# Altium PCB PCB1.PcbDoc
Units mm, origin at the board's own origin, x right, y up, seen from the top; angles counter-clockwise.
Board outline 40.25 x 29.9 mm, 2 copper layers (Top Layer, Bottom Layer); 27 components, 40 nets, 134 pads, 32 vias.
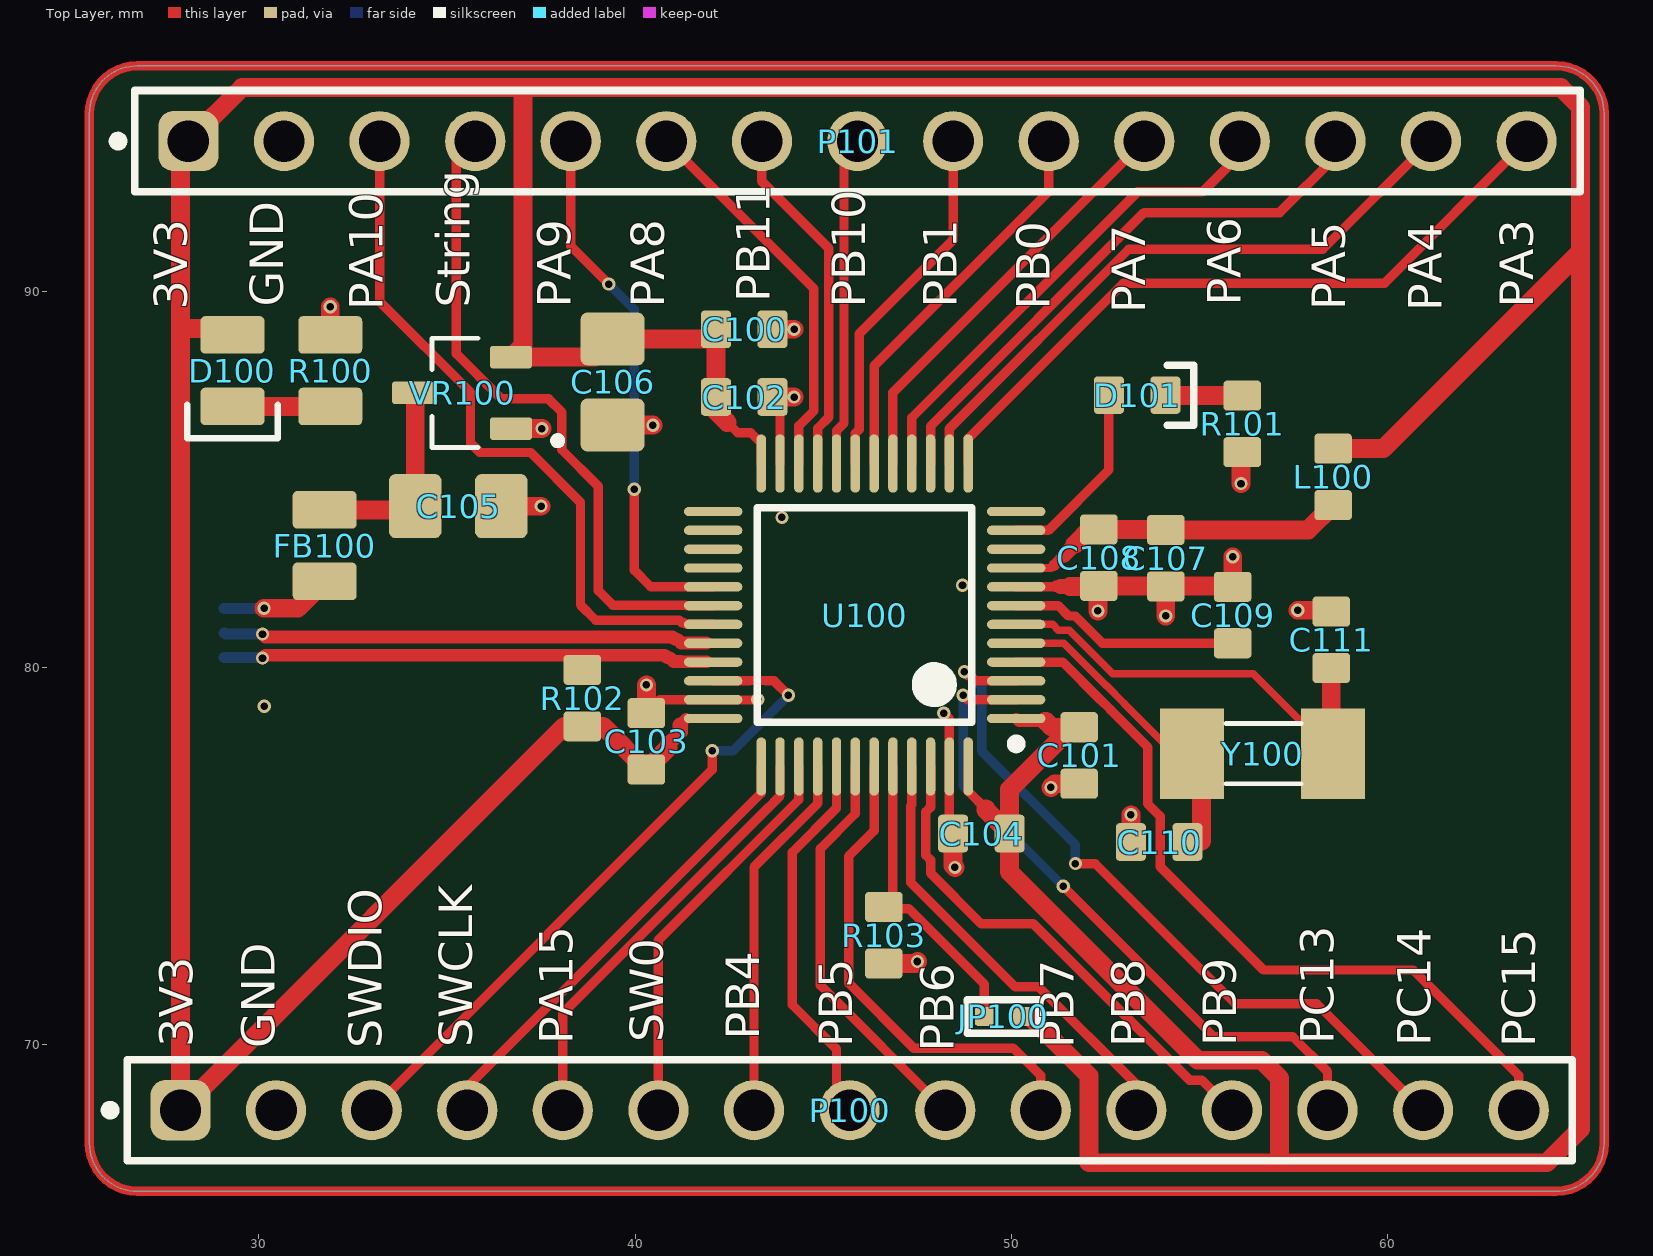
[diagram p0: Top Layer view]
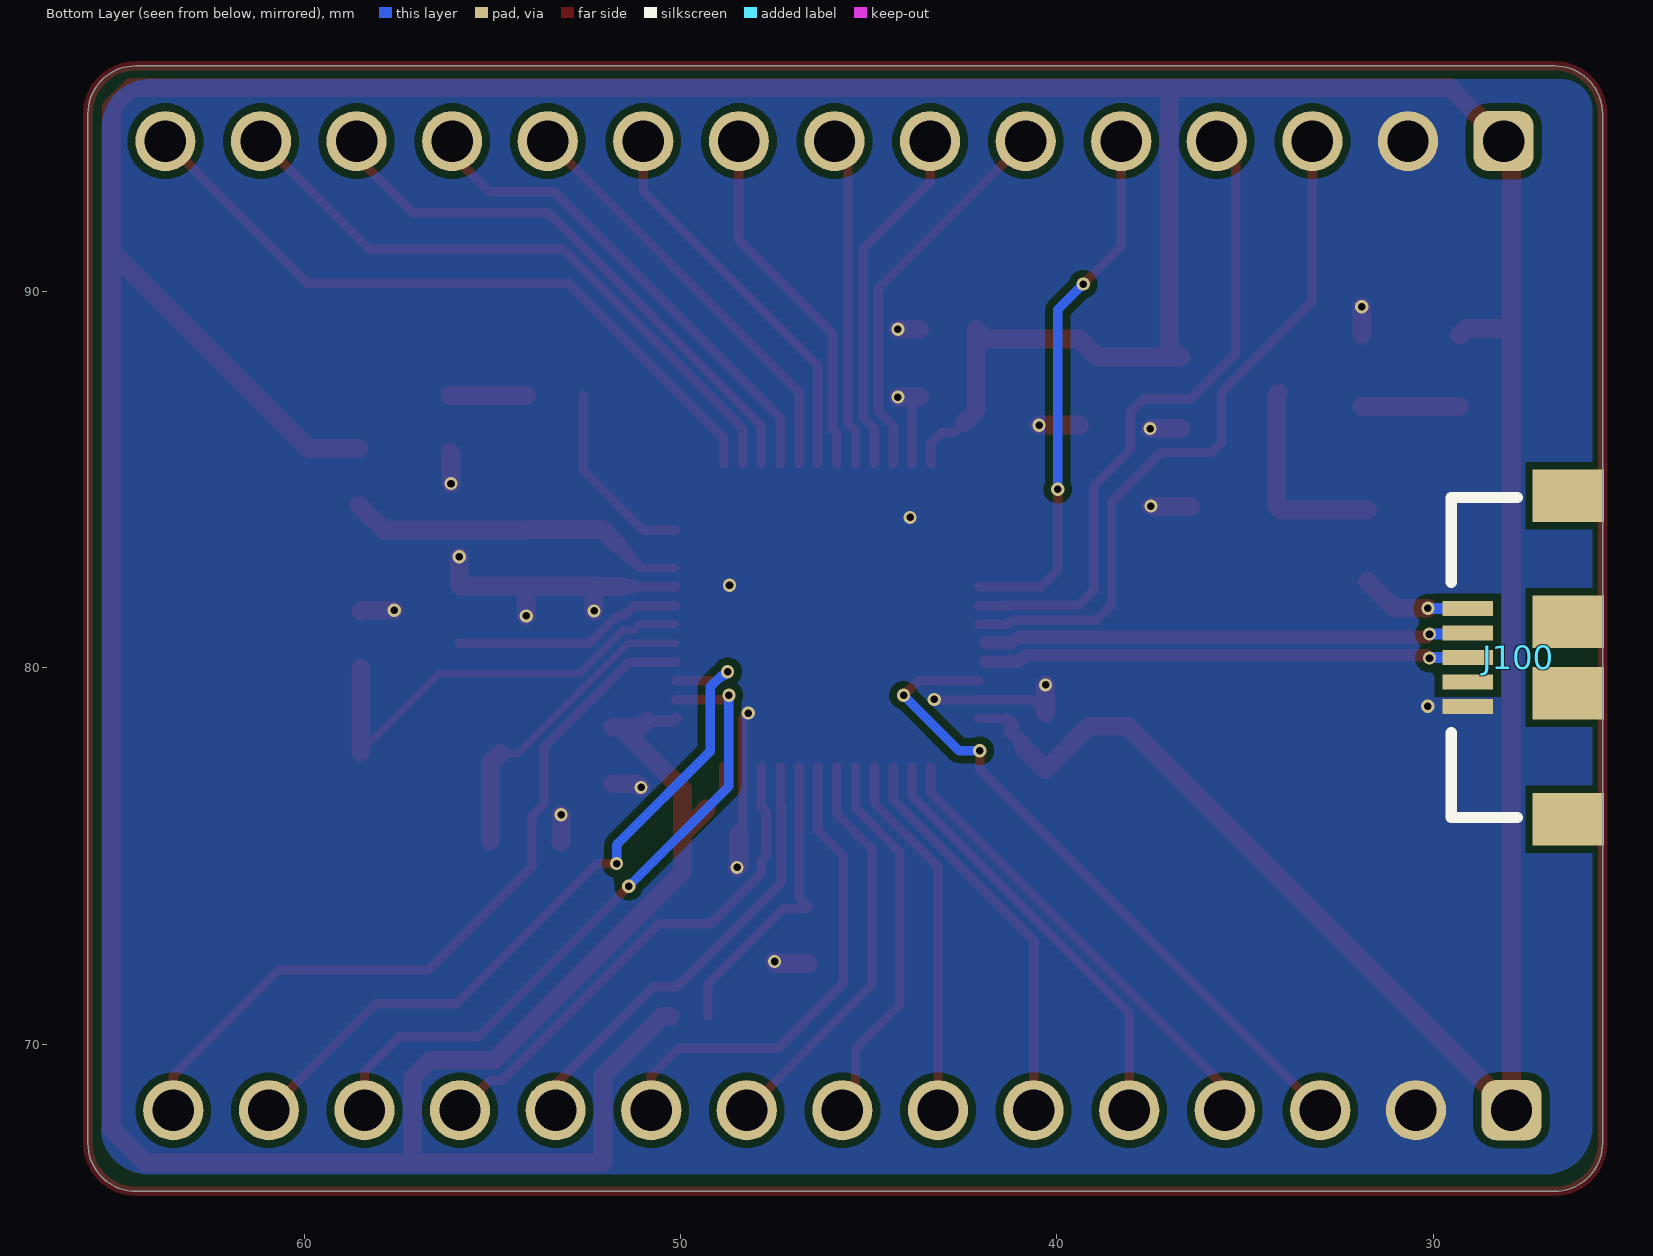
[diagram p1: Bottom Layer view, seen from below]
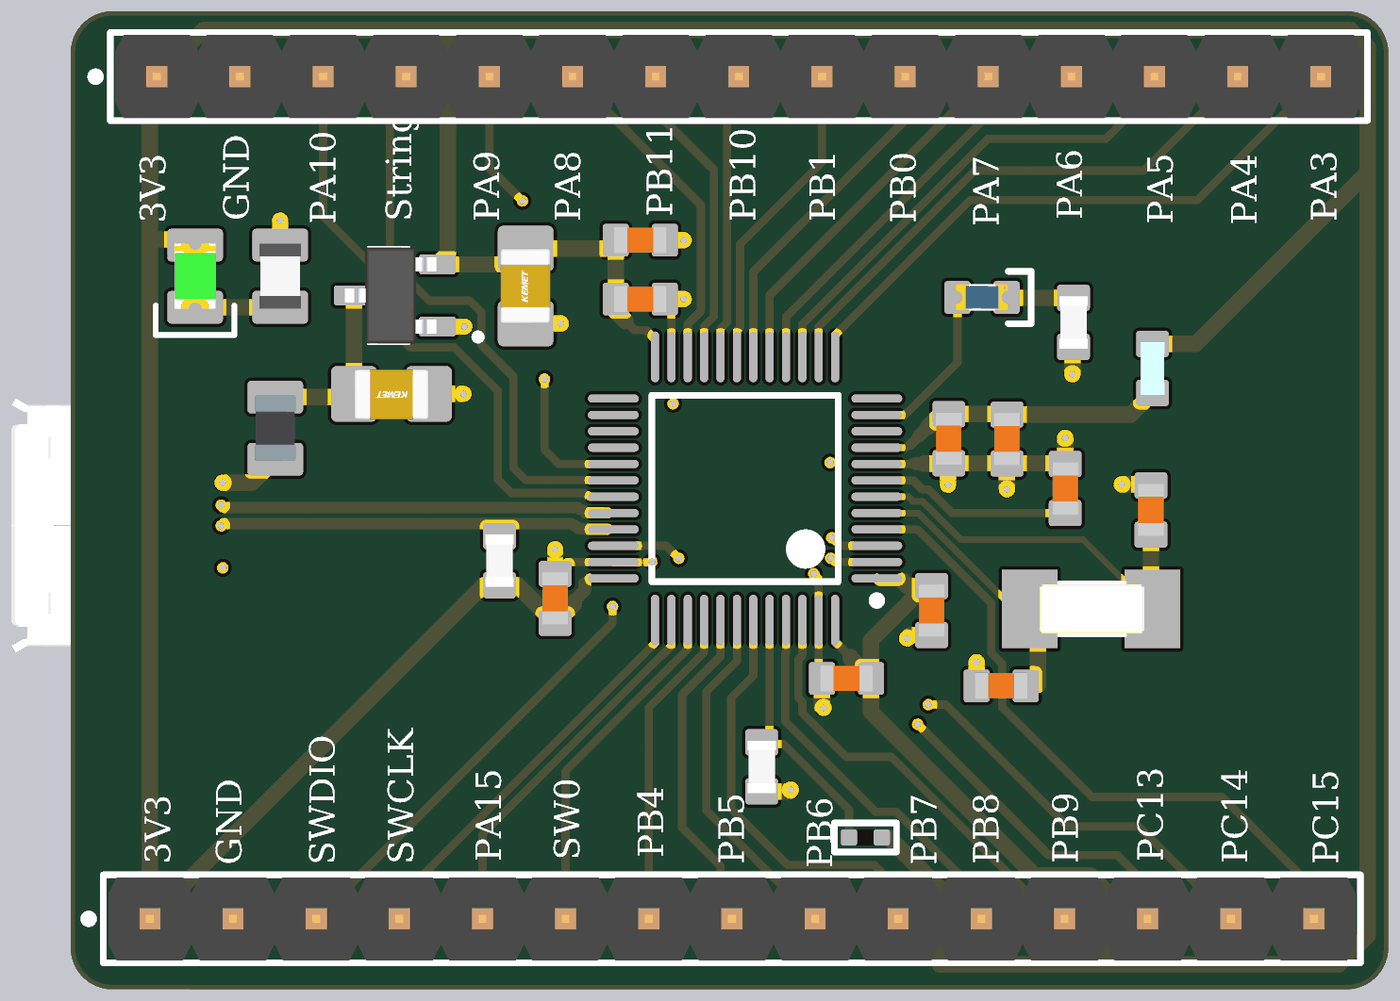
[diagram p2: 3D render of the assembled board from above, using the file's embedded part models]

## Layer stack, top to bottom
Top Solder: solder mask 0.0102, Solder Resist, Dk 3.5
Top Layer: signal copper 0.0356
Dielectric 1: dielectric 0.32, FR-4, Dk 4.5
Bottom Layer: signal copper 0.0356
Bottom Solder: solder mask 0.0102, Solder Resist, Dk 3.5

## Board outline
25.5,67.366 25.5,94.73 cw(c26.77,94.73) 26.77,96 64.48,96 cw(c64.48,94.73) 65.75,94.73 65.75,67.366 cw(c64.48,67.366) 64.48,66.096 26.77,66.096 cw(c26.77,67.366)

## Design rules (kind name [scope] priority, off if disabled: settings)
Clearance [All] p1: gap=0.2 ignorepadtopadclearanceinfootprint=FALSE except(0.15: Arc-Arc Arc-Track Track-Track)
DiffPairsRouting [All] p1: maxlimit=0.15 minlimit=0.15 mostfreqgap=0.15 toplayer_minwidth=0.339 toplayer_maxwidth=0.339 toplayer_prefwidth=0.339 bottomlayer_minwidth=0.339 bottomlayer_maxwidth=0.339 bottomlayer_prefwidth=0.339 impedanceprofiledriven=TRUE impedanceprofileid={EE8C92C1-16C6-4F96-B3D7-698E6856A0D5} impedanceprofilevalue=90.000000 maxuncoupledlength=12.7
PolygonConnect [All] p1: connectstyle=Direct reliefconductorwidth=0.254 reliefentries=4 polygonreliefangle="90 Angle" airgapwidth=0.254
RoutingVias [All] p1: holewidth=0.2 width=0.35 viastyle="Through Hole" minholewidth=0.15 minwidth=0.25 maxholewidth=0.3 maxwidth=0.5
SolderMaskExpansion [All] p1: expansion=0.102 istentingtop=FALSE
SupplyNets "Schematic Supply Nets_3" [InNet('GND')] p1: voltage=0.000
SupplyNets "Schematic Supply Nets_2" [InNet('+5v')] p2: voltage=0.000
SupplyNets "Schematic Supply Nets_1" [InNet('+3V3')] p3: voltage=0.000
SupplyNets "Schematic Supply Nets" [InNet('+3V3A')] p4: voltage=0.000
UnRoutedNet [All] p1: checkbadconnections=TRUE
Width [All] p1: maxlimit=1 minlimit=0.15 preferedwidth=0.2
28 further rules are at their usual default settings.

## Classes and differential pairs
differential pair USB_D: +USB_D_P -USB_D_N

## Components (designator, comment, footprint, x,y, rotation, side; value= is the part's Value field where it differs from the comment)
C100 "4u7" CAP_0603 42.9,89 r180 top
C101 "100n" CAP_0603 51.8,77.675 r90 top
C102 "100n" CAP_0603 42.9,87.2 r180 top
C103 "100n" CAP_0603 40.3,78.05 r270 top
C104 "100n" CAP_0603 49.2,75.6 r0 top
C105 "1u" CAP_0805 35.3,84.3 r180 top
C106 "1u" CAP_0805 39.4,87.6 r90 top
C107 "1u" CAP_0603 54.102,82.919 r90 top
C108 "100n" CAP_0603 52.324,82.931 r90 top
C109 "100n" CAP_0603 55.88,81.407 r270 top
C110 "30p" CAP_0603 53.925,75.375 r0 top
C111 "30p" CAP_0603 58.5,80.75 r270 top
D100 "GREEN" LED_0805_GREEN 29.3,87.9 r90 top
D101 "BLUE" LED_0603_BLUE 53.34,87.249 r180 top
FB100 "100R" FB_0805 31.75,83.251 r90 top
J100 "USB3100-30-A" USB3100-30-A 27.02,80.279 r90 bottom
JP100 "Solder Jumper" SolderJumper_Single 49.776,70.739 r0 top
L100 "27n" IND_0603 58.547,85.078 r270 top
P100 "61301511121" 61301511121 45.7,68.25 r0 top
P101 "61301511121" 61301511121 45.91,94 r0 top
R100 "1k5" RES_0805 31.9,87.9 r90 top
R101 "1k5" RES_0603 56.134,86.487 r90 top
R102 "1k5" RES_0603 38.6,79.2 r270 top
R103 "10k" RES_0603 46.609,72.898 r90 top
U100 "STM32F103C8T6" STM-LQFP48_L 46.101,81.407 r180 top
VR100 "XC6206P302MR-G" SOT95P280X130-3N 35.403,87.31 r180 top
Y100 "8MHz" XTAL_ECS-.327-9-34B-TR 57.297,77.724 r0 top

## Footprints (in the part's own frame and the unit in brackets; to place one, negate y for a bottom-side part, rotate by r counter-clockwise, add the part's x,y. Pads: shape width x height; smd on the part's side, far side on the other; paste and mask are expansions set on the pad)
61301511121 [mm] "Pin Header, pitch 2.54 mm, THT, Vertical, single row, 15p"
  rrect50% 1.6x1.6 hole 1.1: 1(-17.78,0)
  round 1.6 hole 1.1: 2(-15.24,0) 3(-12.7,0) 4(-10.16,0) 5(-7.62,0) 6(-5.08,0) 7(-2.54,0) 8(0,0) 9(2.54,0) 10(5.08,0) 11(7.62,0) 12(10.16,0) 13(12.7,0) 14(15.24,0) 15(17.78,0)
  silkscreen extent -19.77,-1.35 19.2,1.35, body extent -19.05,-1.27 19.05,1.27, height 8.57
CAP_0603 [mm]
  rrect25% 0.8x1 smd: 1(-0.75,0) 2(0.75,0)
  body extent -0.8,-0.4 0.8,0.4, height 0.51
CAP_0805 [mm]
  rrect25% 1.4x1.7 smd: 1(-1.143,0) 2(1.143,0)
  body extent -1.15,-0.76 1.15,0.79, height 1.01
FB_0805 [mm]
  rrect25% 1x1.7 smd: 1(-0.95,0) 2(0.95,0)
  body extent -1,-0.63 1,0.63, height 0.86
IND_0603 [mm]
  rrect25% 0.8x1 smd: 1(-0.75,0) 2(0.75,0)
  body extent -0.81,-0.37 0.81,0.37, height 0.87
LED_0603_BLUE [mm]
  rrect25% 0.8x1 smd: A(0.75,0) K(-0.75,0)
  silkscreen extent -1.5,-0.8 -0.8,0.8, body extent -0.8,-0.4 0.8,0.4, height 0.6
LED_0805_GREEN [mm]
  rrect25% 1x1.7 smd: A(0.95,0) K(-0.95,0)
  silkscreen extent -1.8,-1.2 -0.9,1.2, body extent -1,-0.63 1,0.63, height 1.12
RES_0603 [mm]
  rrect25% 0.8x1 smd: 1(-0.75,0) 2(0.75,0)
  body extent -0.8,-0.43 0.8,0.43, height 0.52
RES_0805 [mm]
  rrect25% 1x1.7 smd: 1(-0.95,0) 2(0.95,0)
  body extent -1,-0.63 1,0.63, height 0.47
SolderJumper_Single [mm]
  rrect35% 0.5x0.5 smd mask+0: 1(-0.5,0) 2(0.5,0)
  silkscreen extent -0.95,-0.44 0.95,0.44
SOT95P280X130-3N [mm]
  rrect25% 1.12x0.6 smd: 1(-1.3,0.95) 2(-1.3,-0.95) 3(1.3,0)
  silkscreen extent -2.64,-1.45 0.8,1.45, body extent -1.27,-1.48 1.53,1.48, height 1.21
STM-LQFP48_L [mm] "QFP, 48-Leads, Body 7x7mm, Pitch 0.5mm, IPC High Density"
  oval 1.55x0.25 smd: 1(-4.025,2.75) 2(-4.025,2.25) 3(-4.025,1.75) 4(-4.025,1.25) 5(-4.025,0.75) 6(-4.025,0.25) 7(-4.025,-0.25) 8(-4.025,-0.75) 9(-4.025,-1.25) 10(-4.025,-1.75) 11(-4.025,-2.25) 12(-4.025,-2.75) 25(4.025,-2.75) 26(4.025,-2.25) 27(4.025,-1.75) 28(4.025,-1.25) 29(4.025,-0.75) 30(4.025,-0.25) 31(4.025,0.25) 32(4.025,0.75) 33(4.025,1.25) 34(4.025,1.75) 35(4.025,2.25) 36(4.025,2.75)
  oval 0.25x1.55 smd: 13(-2.75,-4.025) 14(-2.25,-4.025) 15(-1.75,-4.025) 16(-1.25,-4.025) 17(-0.75,-4.025) 18(-0.25,-4.025) 19(0.25,-4.025) 20(0.75,-4.025) 21(1.25,-4.025) 22(1.75,-4.025) 23(2.25,-4.025) 24(2.75,-4.025) 37(2.75,4.025) 38(2.25,4.025) 39(1.75,4.025) 40(1.25,4.025) 41(0.75,4.025) 42(0.25,4.025) 43(-0.25,4.025) 44(-0.75,4.025) 45(-1.25,4.025) 46(-1.75,4.025) 47(-2.25,4.025) 48(-2.75,4.025)
  silkscreen extent -4.15,-2.85 2.85,3.55, body extent -3.5,-3.5 3.5,3.5, height 1.6
USB3100-30-A [mm]
  rect 0.4x1.35 smd mask+0.15: 1(1.3,2.063) 2(0.65,2.063) 3(0,2.063) 4(-0.65,2.063) 5(-1.3,2.063)
  rect 1.4x1.9 smd: SH(-4.3,-0.613) SH(4.3,-0.613)
  rect 1.4x1.9 smd mask+0.3: SH(-0.95,-0.613) SH(0.95,-0.613)
  silkscreen extent -4.25,0.75 4.25,2.5, body extent -4.61,-3.34 4.61,2.16, height 2.69
XTAL_ECS-.327-9-34B-TR [mm]
  rect 1.7x2.4 smd: 1(-2.5,0) 2(1.25,0)
  silkscreen extent -1.6,-0.8 0.4,0.8, body extent -2.2,-0.75 1,0.75, height 0.9

## Part data
C100 C101 C102 C103 C104 C107 C108 C109 C110 C111: library part CAP_0603, "Capacitor SMD 0603"
C105 C106: library part CAP_0805, "Capacitor SMD 0805"
D100: library part LED_0805_GREEN, "LED 0805 GREEN SMD"
D101: library part LED_0603_BLUE, "LED 0603 BLUE SMD"
FB100: library part FB_0805, "Ferrite Bead SMD 0805"
J100: "USB Connector Type Micro B 2.0 SMD Reverse Mount", Manufacturer=GCT, Manufacturer Part Number=USB3100-30-A
JP100: library part SolderJumper_Single, "Solder Jumper Single 0.5mm Pitch"
L100: library part IND_0603, "Inductor SMD 0603"
P100 P101: library part CMP-207987-000006-3, "CONN HEADER VERT 15POS 2.54MM", Color=Black, Current Rating=3A, Max Operating Temperature=105°C, Min Operating Temperature=-40°C, Voltage Rating=250V, Connector Type="Male Pin", Contact Material=Copper, Contact Mating Length=5.9944mm, Contact Plating=Gold, Gender=Male, Height=8.89mm, Mount="Through Hole", NexarPartId=32855546, Number of Contacts=15, Number of Positions=15, Number of Rows=1, Packaging=Bulk, Pitch=2.54mm, REACH SVHC=Unknown, RoHS=Compliant, Termination=Solder
R100: library part RES_0805, "Resistor SMD 0805"
R101 R102 R103: library part RES_0603, "Resistor SMD 0603"
U100: library part CMP-0237-00215-3, "ARM Cortex-M3 32-bit MCU, 64 KB Flash, 20 KB Internal RAM, 37 I/Os, 48-pin LQFP, -40 to 85 degC, Tray", I/Os (High Current)=37, Operating Frequency(F) (Processor speed) (MHz)=72, Supply Voltage(Vcc) min (V)=2, A/D Converter="2x12-bit (10 Channel)", ComponentLink1Description="Manufacturer URL", ComponentLink1URL=http://www.st.com/web/en/home.html, ComponentLink2Description=Datasheet, ComponentLink2URL=http://www.st.com/st-web-ui/static/active/en/resource/technical/document/datasheet/CD00161566.pdf, ComponentLink3Description="Package Specification", ComponentLink3URL=http://www.st.com/st-web-ui/static/active/en/resource/technical/document/datasheet/DM00058181.pdf, Core="ARM Cortex-M3", DatasheetVersion="Rev. 16", FLASH Size (Prog) (kB)=64, Internal RAM Size (kB)=20, Mounting Technology="Surface Mount", PackageDescription="48-Pin Low Profile Quad Flat Package, 7 x 7 mm Body, 0.5 mm Pitch", PackageReference=LQFP48, PackageVersion="Rev. 6, 06/2013", Packing=Tray, PartNumber=STM32F103C8T6
VR100: "Linear Voltage Regulator IC Positive Fixed 1 Output 200mA SOT-23", Package=None, Check_prices=https://www.snapeda.com/parts/XC6206P302MR-G/Torex/view-part/?ref=eda, MF="Torex Semiconductor Ltd", MP=XC6206P302MR-G, SnapEDA_Link=https://www.snapeda.com/parts/XC6206P302MR-G/Torex/view-part/?ref=snap
Y100: library part ECS-.327-9-34B-TR, "32.768 kHz Â±20ppm Crystal 9pF 70 kOhms 2-SMD, No Lead", Package="ECX-31B-34B-2 ECS", Check_prices=https://www.snapeda.com/parts/ECS-.327-9-34B-TR/ECS/view-part/?ref=eda, MF="ECS Inc.", MP=ECS-.327-9-34B-TR, SnapEDA_Link=https://www.snapeda.com/parts/ECS-.327-9-34B-TR/ECS/view-part/?ref=snap

## Via types
v1: diameter 0.35/0.35 (per signal layer), hole 0.2, Top Layer to Bottom Layer, 32 vias

## Nets (pads, with @x,y where several pads share a name; then routed paths per layer and width w, separated by ;. In a path a pad name is that pad's centre, name@x,y a point inside that pad or via, vN(x,y) a via of type N, cw(c..) or ccw(c..) an arc to the next point about the centre after c; other vN are vias at no path point)
+3V3: C100.2 C101.2 C102.2 C103.2 C104.2 C106.2 D100.A JP100.2 L100.1 P100.1 P101.1 R102.2 U100.1 U100.24 U100.36 U100.48 VR100.2 | length 176.6
  Top Layer w0.25: U100.36@41.35,78.657 U100.36 ; 42.45,86.525 42.725,86.25 43.075,86.25 43.351,85.974 U100.24 ; U100.48 48.851,76.724 49.325,76.25
  Top Layer w0.3: 41.2,78.482 41.187,78.494 U100.36@41.35,78.657 ; U100.1 50.201,78.582 50.9,78.582
  Top Layer w0.4: 40.875,77.9 40.875,78 40.907,78 41.2,78.293 41.2,78.482
  Top Layer w0.5: D100.A 29.125,89.025 27.92,89.025 ; 40.875,77.9 40.875,77.875 C103.2 39.15,78.45 R102.2 38.12,78.45 P100.1 27.92,89.025 ; 42.45,86.525 42.15,86.825 C102.2 C100.2 41.893,88.743 C106.2 38.917,88.26 VR100.2 37.025,88.582 37.025,95.425 ; 49.325,76.25 49.325,76.225 C104.2 ; JP100.2 50.486,70.739 52.061,69.164 52.061,66.85 57.075,66.85 ; 50.9,78.582 50.918,78.582 51.075,78.425 C101.2 51.6,78.425 49.95,76.775 C104.2 ; L100.1 59.878,85.828 65.125,91.075 ; 27.92,89.025 27.92,93.79 P101.1 29.555,95.425 37.025,95.425 ; 37.025,95.425 64.6,95.425 65.125,94.9 65.125,91.075 ; C104.2 49.95,74.575 54.95,69.575 56.65,69.575 57.125,69.1 57.125,66.9 57.075,66.85 ; 57.075,66.85 64.225,66.85 65.125,67.75 65.125,91.075
+3V3A: C107.2 C108.2 L100.2 U100.9 | length 9.1
  Top Layer w0.2: U100.9 51.059,82.657 51.13,82.728
  Top Layer w0.3: 51.13,82.728 51.41,83.007
  Top Layer w0.4: 51.41,83.007 51.689,83.287
  Top Layer w0.5: 51.689,83.287 52.083,83.681 C108.2 54.09,83.681 C107.2 57.888,83.669 L100.2
+5v: FB100.1 J100.1 | length 3
  Top Layer w0.5: v1(30.142,81.586) 31.035,81.586 FB100.1
  Bottom Layer w0.297: J100.1 30.135,81.579 v1(30.142,81.586)
GND: C100.1 C101.1 C102.1 C103.1 C104.1 C105.1 C106.1 C107.1 C108.1 C109.1 C110.1 C111.1 J100.5 P100.2 P101.2 R100.2 R101.1 R103.1 U100.8 U100.23 U100.35 U100.47 VR100.1 | length 27
  Top Layer w0.25: C103.1 40.657,79.157 U100.35 42.083,79.15 43.259,79.15 v1(43.259,79.166) ; C102.1 43.851,86.999 U100.23 ; v1(48.2,78.8) 48.351,78.649 U100.47 48.351,75.699 C104.1 ; U100.8 51.169,82.157 51.181,82.169
  Top Layer w0.3: 51.181,82.169 51.308,82.169
  Top Layer w0.4: 51.308,82.169 51.562,82.169
  Top Layer w0.5: R100.2 v1(31.9,89.6) ; C105.1 v1(37.5,84.3) ; VR100.1 v1(37.525,86.36) ; C106.1 40.468,86.457 v1(40.475,86.45) ; C103.1 v1(40.3,79.55) ; C102.1 v1(44.226,87.2) ; C100.1 v1(44.226,89) ; R103.1 47.448,72.148 v1(47.5,72.2) ; C104.1 48.45,74.75 v1(48.5,74.7) ; v1(51.05,76.825) 51.15,76.925 C101.1 ; 51.562,82.169 52.312,82.169 52.3,82.157 v1(52.3,81.518) ; C108.1 C107.1@54.09,82.181 ; C110.1 v1(53.175,76.1) ; v1(54.102,81.382) C107.1 C107.1@54.09,82.181 ; v1(55.88,82.956) 55.88,82.205 55.856,82.181 C107.1@54.09,82.181 ; v1(56.1,84.9) 56.1,85.703 R101.1 ; v1(57.607,81.534) 58.466,81.534 C111.1
  other v1: 30.147,78.983 48.7,82.2 43.9,84
LED_BLUE: D101.A U100.11 | length 5.1
  Top Layer w0.25: U100.11 50.982,83.657 52.59,85.265 D101.A
MCU_BOOT0: JP100.1 R103.2 U100.44 | length 8.2
  Top Layer w0.25: U100.44 46.851,73.89 R103.2 46.657,73.6 47.275,73.6 49.276,71.599 JP100.1
MCU_NRST: C109.2 U100.7 | length 6.2
  Top Layer w0.25: U100.7 51.243,81.657 51.518,81.382 51.693,81.382 52.418,80.657 C109.2
MCU_OSC_IN: C110.2 U100.5 Y100.1 | length 8.3
  Top Layer w0.2: U100.5 51.393,80.657 52.525,79.525 52.531,79.525 53,79.056 53,79.05 54.326,77.724 Y100.1
  Top Layer w0.5: Y100.1 55.052,77.469 C110.2@55.052,75.403
MCU_OSC_OUT: C111.2 U100.6 Y100.2 | length 12.1
  Top Layer w0.2: U100.6 51.093,81.157 51.243,81.007 51.538,81.007 52.695,79.85 56.421,79.85 58.5,77.771 Y100.2
  Top Layer w0.5: Y100.2@58.5,77.771 C111.2
NetD100_K: D100.K R100.1 | length 2.6
  Top Layer w0.5: D100.K R100.1
NetD101_K: D101.K R101.2 | length 2
  Top Layer w0.5: D101.K 54.102,87.237 R101.2
NetP100_3: P100.3 U100.34 | length 18.1
  Top Layer w0.25: P100.3 42.05,77.3 v1(42.05,77.8) ; U100.34 43.043,79.657 43.052,79.666 43.466,79.666 43.475,79.657 43.693,79.657 v1(44.075,79.275)
  Bottom Layer w0.25: v1(42.05,77.8) 42.6,77.8 v1(44.075,79.275)
NetP100_4: P100.4 U100.37 | length 12.4
  Top Layer w0.25: P100.4 35.54,68.865 43.351,76.676 U100.37
NetP100_5: P100.5 U100.38 | length 11.5
  Top Layer w0.25: P100.5 38.08,70.83 43.532,76.282 43.537,76.282 43.801,76.546 43.801,76.551 43.851,76.601 U100.38
NetP100_6: P100.6 U100.39 | length 10.7
  Top Layer w0.25: P100.6 40.62,72.77 44.351,76.501 U100.39
NetP100_7: P100.7 U100.40 | length 9.8
  Top Layer w0.25: P100.7 43.16,74.71 44.851,76.401 U100.40
NetP100_8: P100.8 U100.41 | length 10.3
  Top Layer w0.25: U100.41 45.351,76.276 44.175,75.1 44.175,71.05 45.351,69.874 45.351,68.599 P100.8
NetP100_9: P100.9 U100.42 | length 10.9
  Top Layer w0.25: U100.42 45.851,76.126 44.924,75.199 44.924,71.566 P100.9
NetP100_10: P100.10 U100.43 | length 13.1
  Top Layer w0.25: U100.43 46.351,75.676 45.675,75 45.675,71.625 47.4,69.9 50.05,69.9 50.78,69.17 P100.10
NetP100_11: P100.11 U100.45 | length 12
  Top Layer w0.25: U100.45 47.351,76.368 47.325,76.342 47.325,74.858 47.325,74.3 50.1,71.525 50.725,71.525 53.32,68.93 P100.11
NetP100_12: P100.12 U100.46 | length 13.6
  Top Layer w0.25: U100.46 47.851,76.302 47.725,76.176 47.725,75.024 47.851,74.898 47.851,74.549 49.2,73.2 50.583,73.2 54.733,69.05 55.06,69.05 P100.12
NetP100_13: P100.13 U100.2 | length 17.7
  Top Layer w0.25: v1(48.716,79.275) 48.725,79.275 48.843,79.157 U100.2 ; v1(51.375,74.2) 55.375,70.2 57.475,70.2 58.4,69.275 P100.13
  Bottom Layer w0.25: v1(48.716,79.275) 48.716,76.859 v1(51.375,74.2)
NetP100_14: P100.14 U100.3 | length 19.8
  Top Layer w0.25: v1(48.75,79.9) 48.875,79.775 48.932,79.775 49.05,79.657 U100.3 ; v1(51.7,74.8) 52.225,74.8 55.95,71.075 58.115,71.075 P100.14
  Bottom Layer w0.25: v1(48.75,79.9) 48.875,79.775 48.932,79.775 49.216,79.491 49.216,77.784 51.7,75.3 v1(51.7,74.8)
NetP100_15: P100.15 U100.4 | length 20.5
  Top Layer w0.25: U100.4 51.363,80.157 52.37,79.15 52.376,79.15 52.625,78.901 52.625,78.895 53.622,77.898 53.622,76.389 53.95,76.061 53.95,74.725 56.7,71.975 60.675,71.975 63.48,69.17 P100.15
NetP101_3: P101.3 U100.31 | length 19.1
  Top Layer w0.25: P101.3 33.21,89.74 35.625,87.325 35.625,85.975 35.875,85.725 37.225,85.725 38.55,84.4 38.55,81.675 38.955,81.27 41.176,81.27 41.24,81.207 41.305,81.207 41.355,81.157 U100.31
NetP101_4: P101.4 U100.30 | length 17.7
  Top Layer w0.25: P101.4 35.25,93.5 35.25,88.35 36.45,87.15 37.7,87.15 38.05,86.8 38.05,85.8 39.025,84.825 39.025,82.05 39.405,81.67 41.342,81.67 41.355,81.657 U100.30
NetP101_5: P101.5 U100.29 | length 14.4
  Top Layer w0.25: P101.5 38.29,91.21 v1(39.3,90.2) ; v1@40,84.75 39.975,84.725 39.975,82.6 40.418,82.157 U100.29
  Bottom Layer w0.25: v1(39.3,90.2) 39.975,89.525 v1(39.975,84.75)
NetP101_6: P101.6 U100.22 | length 10.4
  Top Layer w0.25: P101.6 44.751,90.079 44.751,88.089 44.751,86.834 44.351,86.434 U100.22
NetP101_7: P101.7 U100.21 | length 9.4
  Top Layer w0.25: P101.7 43.37,92.93 45.151,91.149 45.151,87.923 45.151,86.668 44.851,86.368 U100.21
NetP101_8: P101.8 U100.20 | length 8.8
  Top Layer w0.25: U100.20 45.351,86.302 45.551,86.502 45.551,87.757 45.551,93.641 P101.8
NetP101_9: P101.9 U100.19 | length 9.6
  Top Layer w0.25: U100.19 45.851,86.237 45.951,86.337 45.951,87.592 45.951,88.876 48.45,91.375 P101.9
NetP101_10: P101.10 U100.18 | length 10.5
  Top Layer w0.25: U100.18 46.351,87.426 46.351,88.026 50.99,92.665 P101.10
NetP101_11: P101.11 U100.17 | length 11.3
  Top Layer w0.25: U100.17 46.851,87.321 P101.11
NetP101_12: P101.12 U100.16 | length 13.2
  Top Layer w0.25: U100.16 47.351,86.651 53.35,92.65 55.075,92.65 56.07,93.645 P101.12
NetP101_13: P101.13 U100.15 | length 15.1
  Top Layer w0.25: U100.15 47.851,86.426 53.525,92.1 57.125,92.1 58.61,93.585 P101.13
NetP101_14: P101.14 U100.14 | length 16.9
  Top Layer w0.25: U100.14 48.351,86.36 53.116,91.125 58.275,91.125 P101.14
NetP101_15: P101.15 U100.13 | length 18.8
  Top Layer w0.25: U100.13 48.851,86.101 52.975,90.225 59.915,90.225 P101.15
USB_D_N: J100.2 U100.32 | length 12.9
  Top Layer w0.339: v1(30.099,80.899) 30.172,80.826 40.992,80.826 41.056,80.763 41.121,80.763 41.221,80.663 U100.32@41.9,80.663
  Bottom Layer w0.297: J100.2 29.113,80.899 v1(30.099,80.899)
USB_D_P: J100.3 R102.1 U100.33 | length 12.9
  Top Layer w0.339: v1(30.099,80.264) 30.172,80.337 40.79,80.337 40.853,80.274 40.919,80.274 41.019,80.174 41.21,80.174 41.221,80.163 U100.33@41.9,80.163
  Bottom Layer w0.297: J100.3 30.084,80.279 v1(30.099,80.264)
VCC: C105.2 FB100.2 VR100.3 | length 5.3
  Top Layer w0.5: FB100.2 C105.2@34.058,84.201 ; VR100.3 34.157,87.256 C105.2
pads on no net: J100.4 J100.SH U100.10 U100.12 U100.25 U100.26 U100.27 U100.28
copper on no net: | length 138.1
  Top Layer w0.254: 25.5,67.366 ccw(c26.77,67.366) 26.77,66.096 29.578,66.096 64.48,66.096 ccw(c64.48,67.366) 65.75,67.366 65.75,94.73 ccw(c64.48,94.73) 64.48,96 26.77,96 ccw(c26.77,94.73) 25.5,94.73 25.5,67.366

## Polygon pours and split planes (outlines as drawn)
GND on Bottom Layer "GND_L02_P000" (solid, pour order 0): 64.075,95.65 cw(c64.075,94.35) 65.375,94.35 65.375,67.825 ccw(c65.4,67.825) 65.4,67.8 cw(c64.15,67.8) 64.15,66.55 27.025,66.55 cw(c27.025,67.8) 25.775,67.8 25.775,94.825 cw(c26.6,94.825) 26.6,95.65

## Silkscreen, mask and mechanical layers (free items; w line width, h text height)
Top Overlay:
  text "PB11" at 43.871,89.725 h1.52 r90
  text "PA6" at 56.389,89.625 h1.52 r90
  text "GND" at 30.939,89.6 h1.52 r90
  text "String" at 35.902,89.575 h1.52 r90
  text "PA9" at 38.589,89.575 h1.52 r90
  text "PA8" at 41.064,89.575 h1.52 r90
  text "PB10" at 46.414,89.575 h1.52 r90
  text "PB1" at 48.846,89.575 h1.52 r90
  text "PA3" at 64.164,89.575 h1.52 r90
  text "3V3" at 28.389,89.525 h1.52 r90
  text "PB0" at 51.314,89.525 h1.52 r90
  text "PA10" at 33.589,89.5 h1.52 r90
  text "PA5" at 59.164,89.5 h1.52 r90
  text "PA4" at 61.721,89.475 h1.52 r90
  text "PA7" at 53.846,89.425 h1.52 r90
  text "PB4" at 43.596,70.125 h1.52 r90
  text "SW0" at 41.039,70.05 h1.52 r90
  text "PA15" at 38.639,70 h1.52 r90
  text "PC13" at 58.864,70 h1.52 r90
  text "PB9" at 56.264,69.95 h1.52 r90
  text "PC14" at 61.44,69.95 h1.52 r90
  text "3V3" at 28.539,69.925 h1.52 r90
  text "SWCLK" at 35.964,69.925 h1.52 r90
  text "PB5" at 46.064,69.925 h1.52 r90
  text "PB8" at 53.839,69.925 h1.52 r90
  text "PC15" at 64.214,69.925 h1.52 r90
  text "GND" at 30.714,69.9 h1.52 r90
  text "SWDIO" at 33.564,69.9 h1.52 r90
  text "PB7" at 51.946,69.9 h1.52 r90
  text "PB6" at 48.764,69.8 h1.52 r90

## Text inside footprints (layer, text, board x,y; h text height)
D100: Mechanical 13 "+" at 28.3,89.667 h1 r90
D101: Mechanical 13 "+" at 52.023,86.641 h0.5 r180